# EAGLE board buttonboard (EAGLE 8.2.2)
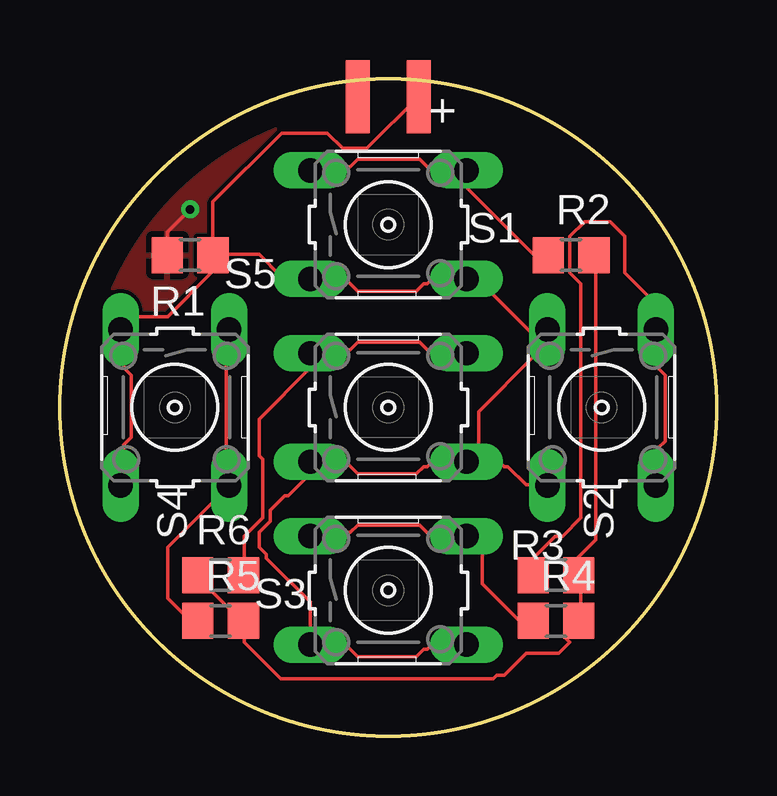
[diagram p0: board, top side]
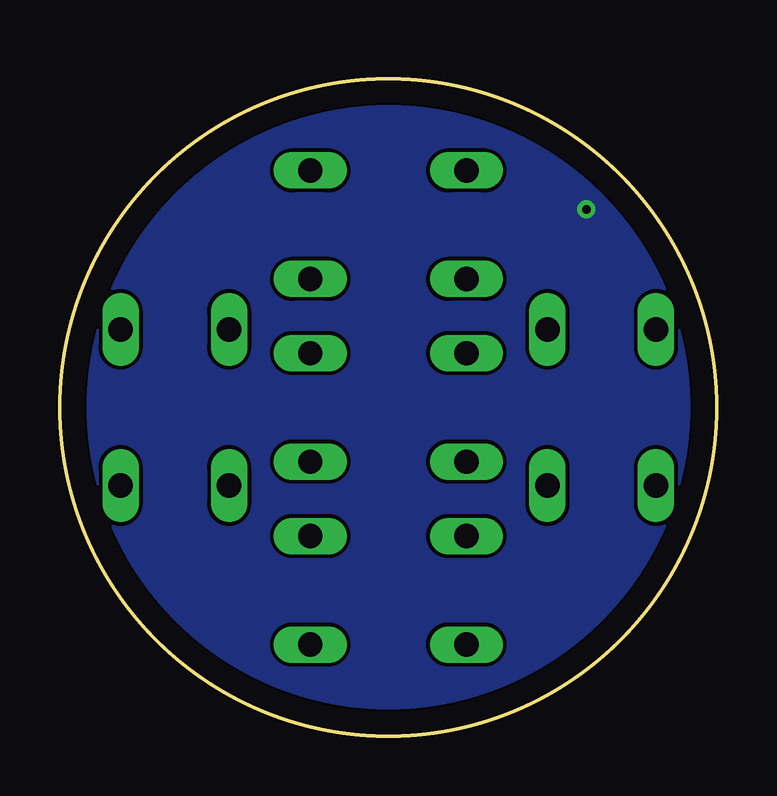
[diagram p1: board, bottom side, seen from below]

Size 27.36 x 27.36 mm. Coordinates in mm from the lower left corner, seen from the top.
Outline: circle at 13.68,13.68 radius 13.68
Copper layers (1*16): Top 0.035mm / dielectric 1.5mm / Bottom 0.035mm
Design rules "default": minimum track width 6mil, minimum drill 0.35mm, track to track 6mil, track to pad 6mil, pad to pad 6mil, via to via 6mil, smd to smd 6mil, copper to edge 40mil, drill to drill 6mil, minimum pad ring 10mil, minimum via ring 8mil, stop-mask expansion 4mil, vias tented up to drill 0mil, thermal gap 10mil

## Footprints (pad centres in the part's own frame; a part is rotated, then mirrored left to right if it is on the bottom)
R0805 = smd 1.3 x 1.5: 1 -0.95,0; 2 0.95,0
B3F-10XX = drill 1.016 long: 1 -3.251,2.261; 2 3.251,2.261; 3 -3.251,-2.261; 4 3.251,-2.261
EDGE_CON_2 = smd 1.016 x 3.048: 1 1.27,1.524; 2 -1.27,1.524

## Placement (x,y rotation side)
R1  10k  [R0805]  5.42,20.03 180 top
R2  1K  [R0805]  21.3,20.03 0 top
R3  2k  [R0805]  20.66,6.69 0 top
R4  10k  [R0805]  20.66,4.79 0 top
R5  12k  [R0805]  6.69,4.79 0 top
R6  39k  [R0805]  6.69,6.69 180 top
S1  [B3F-10XX]  13.68,21.3 0 top
S2  [B3F-10XX]  22.57,13.68 270 top
S3  [B3F-10XX]  13.68,6.06 0 top
S4  [B3F-10XX]  4.79,13.68 270 top
S5  [B3F-10XX]  13.68,13.68 0 top
U$1  EDGE_CON  [EDGE_CON_2]  13.68,25.11 0 top

## Library data of the parts
R1-R6 = resistor
S1-S5 = switch-omron; MPN: B3F-1000; OC_FARNELL: 176432; OC_NEWARK: 36M3542
U$1 = WISE

## Nets
+3V3: R2.2 R3.2 R4.2 R5.2 R6.2
DPAD: R1.1 S1.3 S1.4 S2.3 S2.4 S3.3 S3.4 S4.3 S4.4 S5.3 S5.4 U$1.1
GND: R1.2
N$27: R2.1 S1.1 S1.2
N$29: R3.1 S2.1 S2.2
N$31: R4.1 S3.1 S3.2
N$33: R5.1 S4.1 S4.2
N$35: R6.1 S5.1 S5.2

## Tracks (layer width: path | path; a pad name or v marks a point on that pad's centre or on a via)
+3V3
  Top 0.152: R6.2 5.7,6.64 7.53,4.81 R5.2 7.68,4.66 7.68,3.9 9.21,2.38 18.05,2.38 18.2,2.53 18.5,2.53 19.42,3.44 20.79,3.44 21.25,3.9 21.1,4.05 21.1,4.2 21.55,4.66 R4.2 21.7,4.81 21.7,6.64 R3.2 21.55,6.8 21.55,7.4 22.31,8.17 22.31,19.9 R2.2
DPAD
  Top 0.152: R1.1 6.46,20.05 8.29,20.05 9.21,19.14 10.43,19.14 S1.3 10.43,18.99 11.95,18.99 12.41,18.53 14.85,18.53 15.15,18.83 15.3,18.83 15.46,18.99 16.83,18.99 S1.4 16.98,18.99 17.44,18.99 19.57,16.85 19.72,16.85 | S4.4 2.65,10.45 2.65,12.13 2.96,12.43 2.96,15.02 2.65,15.33 2.65,16.85 S4.3 2.65,17.01 3.11,17.46 4.48,17.46 6.31,19.29 6.31,19.9 R1.1 | S3.4 16.83,3.75 15.46,3.75 15.3,3.59 15.15,3.59 14.85,3.29 12.41,3.29 11.95,3.75 10.43,3.75 S3.3 10.43,5.58 8.6,7.4 8.6,7.56 8.29,7.86 8.29,8.47 8.75,8.93 8.75,9.39 9.36,10 9.51,10 10.43,10.91 10.43,11.37 | 19.72,16.85 20.18,16.85 S2.3 19.72,16.85 | 10.43,11.37 11.95,11.37 12.41,10.91 14.85,10.91 15.15,11.21 15.3,11.21 15.46,11.37 16.83,11.37 S5.4 | 17.44,11.37 16.98,11.37 S5.4 | 17.44,11.37 18.35,11.37 18.5,11.21 18.66,11.21 19.42,10.45 20.18,10.45 S2.4 | 19.72,16.85 19.72,15.79 17.44,13.5 17.44,11.37 | 17.44,11.37 S5.4 | 10.43,11.37 S5.3 | R1.1 6.37,22.25 9.23,25.11 11.14,25.11 11.77,24.47 12.79,24.47 U$1.1
GND  (via drill 0.35)
  Top 0.152: R1.2 4.47,20.98 v5.42,21.93
  pour Top: -0.29,27.65 27.65,27.65 27.65,-0.93 -0.29,-0.93
  pour Bottom: -1.56,-0.29 27.65,-0.29 27.65,28.92 -1.56,28.92
N$27
  Top 0.152: R2.1 20.33,20.05 19.72,20.05 16.98,22.8 16.98,23.56 S1.2 15.46,23.56 15,24.02 12.41,24.02 12.1,23.71 11.95,23.71 11.8,23.56 S1.1
N$29
  Top 0.152: R3.1 19.72,6.8 19.72,7.4 20.64,8.32 20.94,8.32 21.7,9.08 21.7,18.83 21.25,19.29 21.25,20.82 21.86,21.43 22.92,21.43 23.53,20.82 23.53,19.29 24.75,18.07 24.75,17.01 S2.1 24.91,16.85 24.91,15.33 25.21,15.02 25.21,12.28 24.91,11.98 24.91,10.45 S2.2
N$31
  Top 0.152: R4.1 19.57,4.81 19.11,4.81 17.59,6.34 17.59,7.71 16.98,8.32 S3.2 15.46,8.32 15,8.78 12.41,8.78 12.1,8.47 11.95,8.47 11.8,8.32 S3.1
N$33
  Top 0.152: R5.1 5.7,4.81 5.4,4.81 4.48,5.73 4.48,7.86 S4.2 6.92,10.45 6.92,16.85 S4.1
N$35
  Top 0.152: R6.1 7.68,6.8 7.68,8.32 8.45,9.08 8.45,11.52 8.29,11.67 8.29,13.2 10.43,15.33 S5.1 10.58,16.09 12.1,16.09 12.41,16.4 15,16.4 15.46,15.94 S5.2